# Altium PCB Steering_Wheel_ECU.PcbDoc
Units mm, origin at the board's own origin, x right, y up, seen from the top; angles counter-clockwise.
Board outline 46 x 34.8 mm, 2 copper layers (Top Layer, Bottom Layer); 85 components, 50 nets, 247 pads, 33 vias.
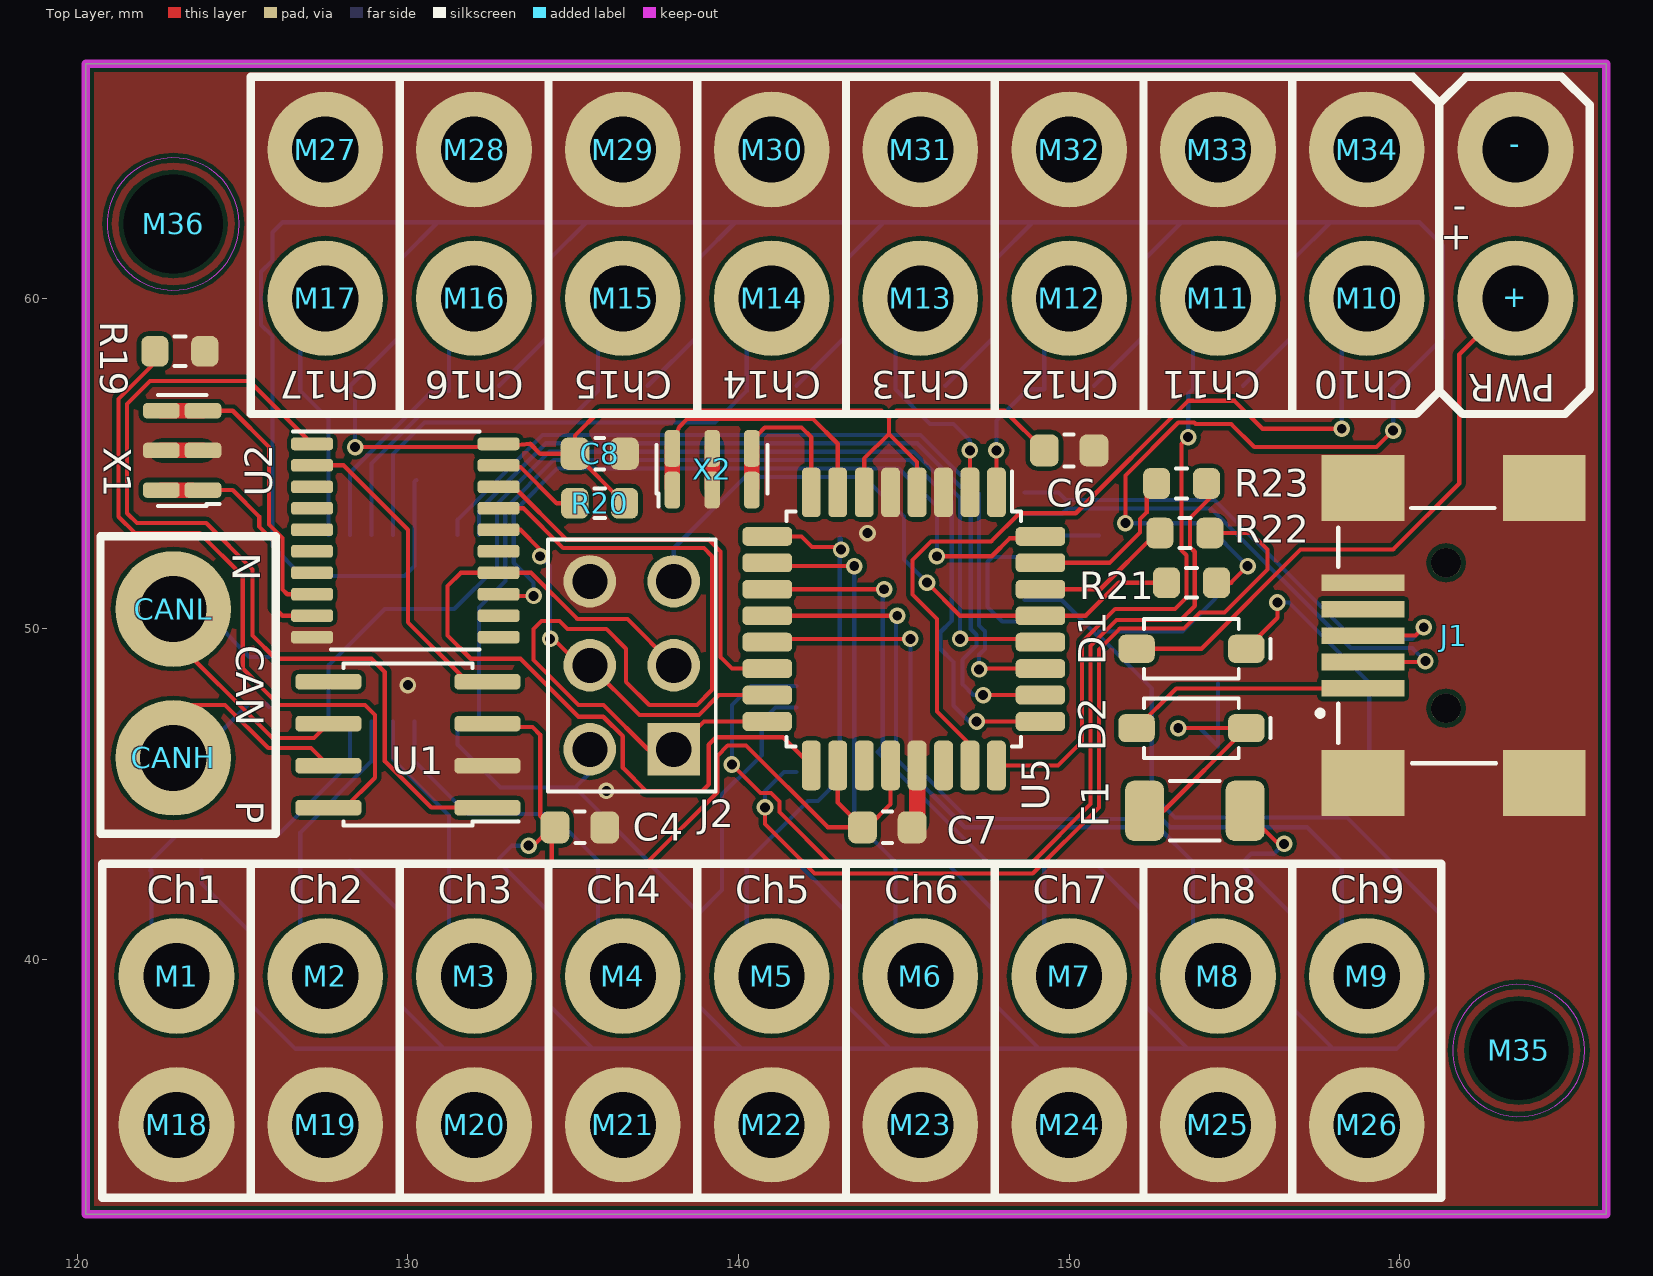
[diagram p0: Top Layer view]
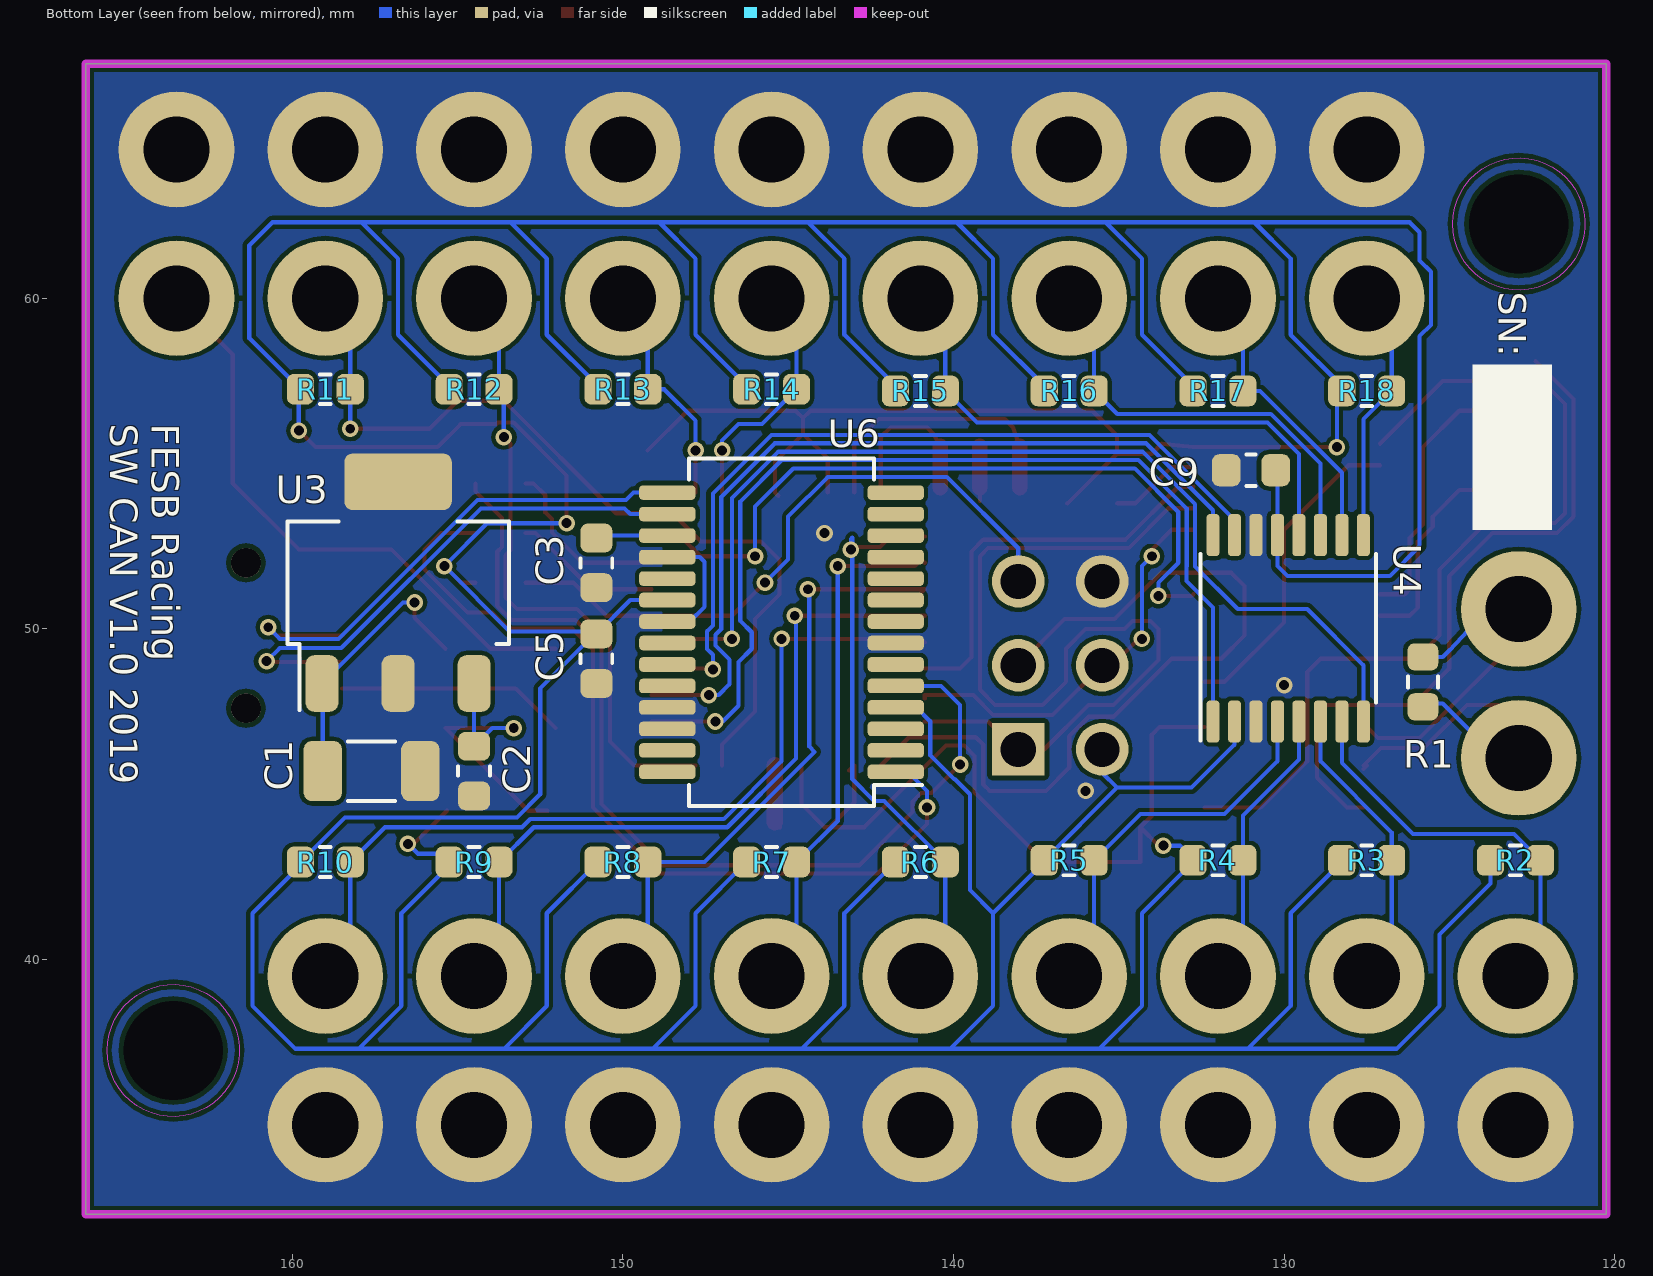
[diagram p1: Bottom Layer view, seen from below]
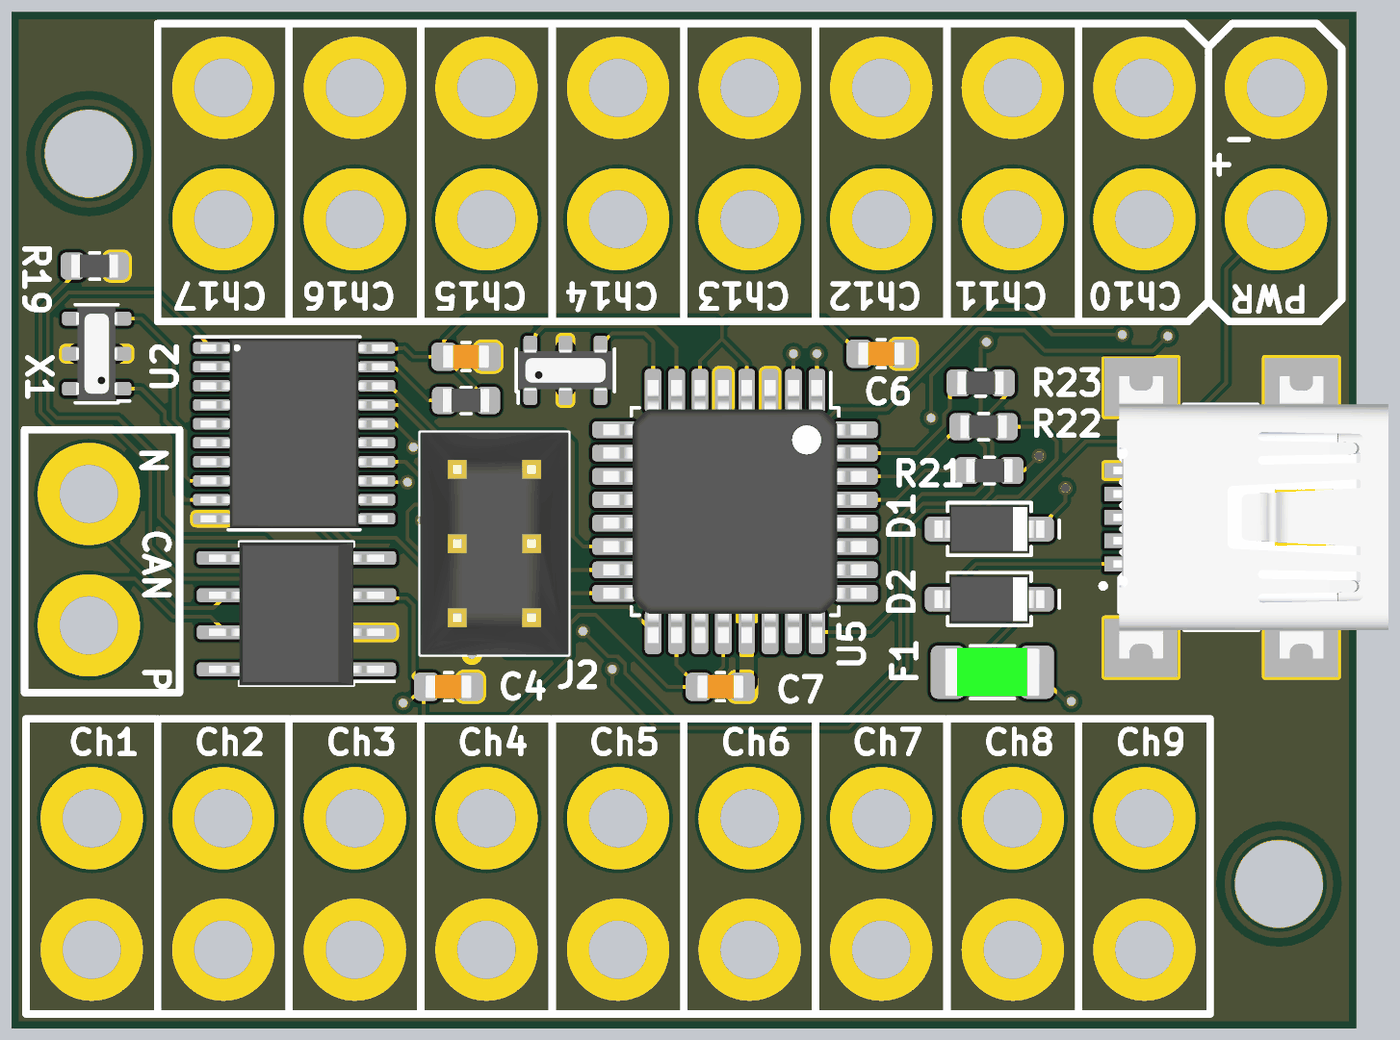
[diagram p2: 3D render of the assembled board from above, using the file's embedded part models]
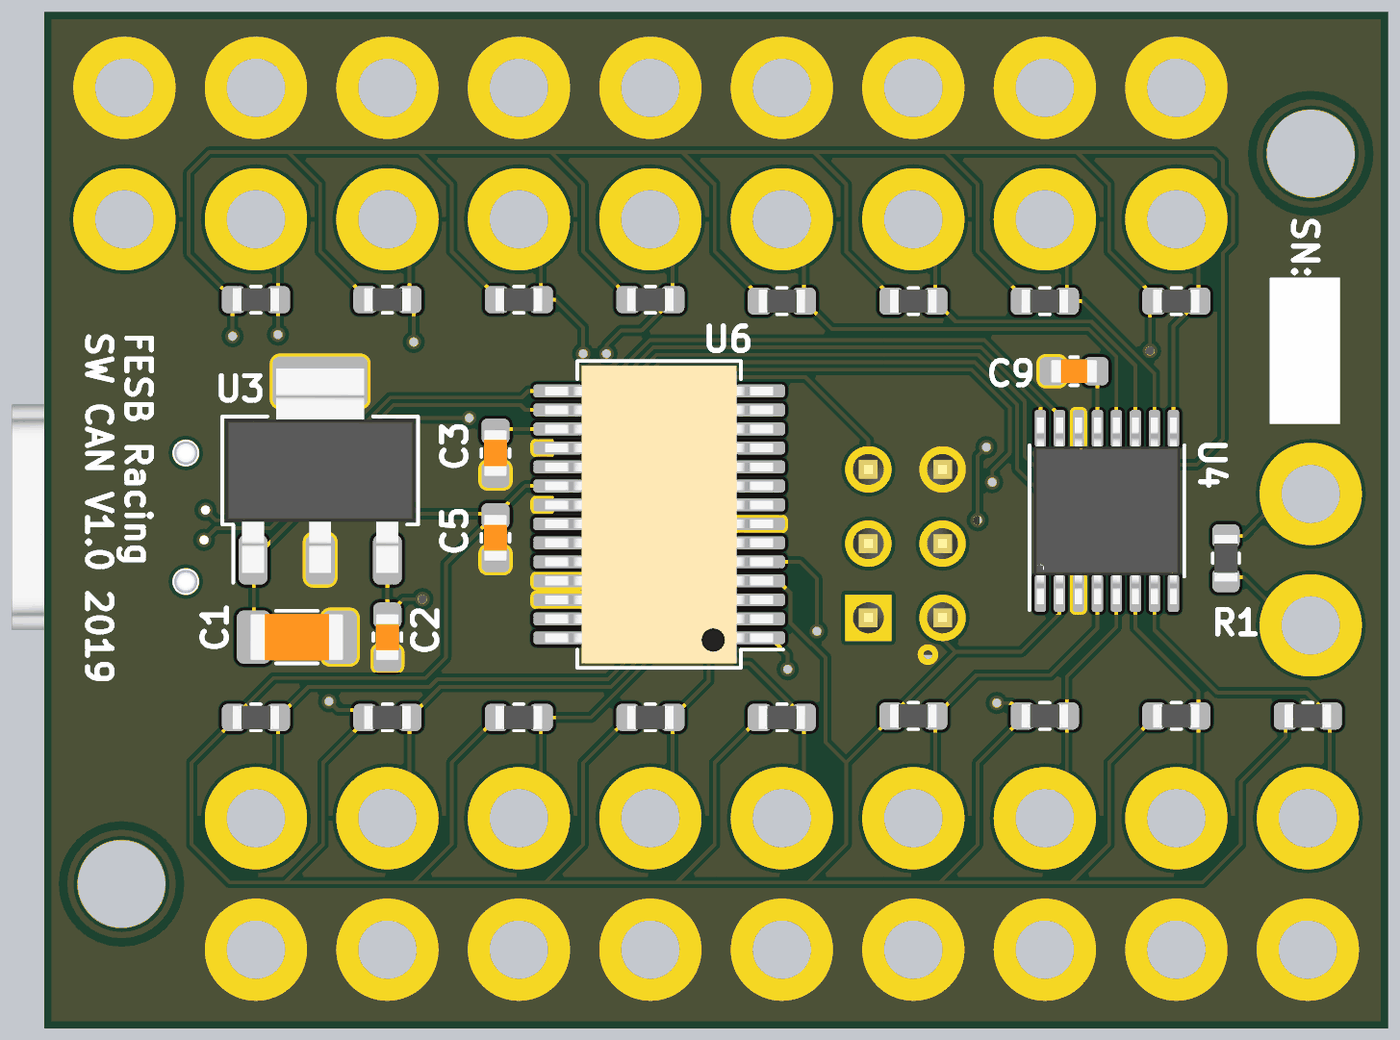
[diagram p3: 3D render of the assembled board from below, using the file's embedded part models]

## Layer stack, top to bottom
Top Solder: solder mask 0.0102, Solder Resist, Dk 3.5
Top Layer: signal copper 0.0356
Dielectric 1: dielectric 0.32, FR-4, Dk 4.8
Bottom Layer: signal copper 0.0356
Bottom Solder: solder mask 0.0102, Solder Resist, Dk 3.5

## Board outline
120.25,32.3 120.25,67.1 166.25,67.1 166.25,32.3

## Design rules (kind name [scope] priority, off if disabled: settings)
Clearance [All] p1: gap=0.127 ignorepadtopadclearanceinfootprint=FALSE except(0: Arc-Hole Track-Hole SMDPad-Hole THPad-Hole Via-Hole Fill-Hole Poly-Hole Region-Hole Text-Hole)
ComponentClearance [All] p1: gap=0.1 collisioncheckmode=3 verticalgap=0.254 showdistances=FALSE
DiffPairsRouting [All] p1: maxlimit=0.254 minlimit=0.127 mostfreqgap=0.178 toplayer_minwidth=0.127 toplayer_maxwidth=0.254 toplayer_prefwidth=0.127 bottomlayer_minwidth=0.127 bottomlayer_maxwidth=0.254 bottomlayer_prefwidth=0.127 maxuncoupledlength=12.7
HoleSize [All] p1: absolutevalues=TRUE maxlimit=5 minlimit=0.025 maxpercent=80.000 minpercent=20.000
MinimumSolderMaskSliver [All] p1: minsoldermaskwidth=0
PlaneConnect [All] p1: planeconnectstyle=Direct reliefexpansion=0.2 reliefentries=4 reliefconductorwidth=0.254 reliefairgap=0.5
PolygonConnect [All] p1: connectstyle=Direct reliefconductorwidth=0.254 reliefentries=4 polygonreliefangle="90 Angle" airgapwidth=0.254
RoutingVias [All] p1: holewidth=0.3 width=0.5 viastyle="Through Hole" minholewidth=0.3 minwidth=0.5 maxholewidth=0.3 maxwidth=0.5
SilkToSilkClearance [All] p1: silktosilkclearance=0.1
SilkToSolderMaskClearance [IsPad] p1: minsilkscreentomaskgap=0.1 clearancetoexposedcopper=TRUE
SolderMaskExpansion [All] p1: expansion=0.102
Width [All] p1: maxlimit=10 minlimit=0.127 preferedwidth=0.127
23 further rules are at their usual default settings.

## Classes and differential pairs
differential pair CAN: +CAN_P -CAN_N

## Components (designator, comment, footprint, x,y, rotation, side; value= is the part's Value field where it differs from the comment)
+ "2mm" HOLE_2MM 163.5,60 r180 top
- "2mm" HOLE_2MM 163.5,64.5 r270 top
C1 "330nF" CAPC320X160X90L50N 157.6,45.7 r180 bottom
C2 "100nF" CAPC160X80X87L35N 154.5,45.7 r270 bottom
C3 "100nF" CAPC160X80X87L35N 150.8,52 r270 bottom
C4 "100nF" CAPC160X80X87L35N 135.2,44 r0 top
C5 "100nF" CAPC160X80X87L35N 150.8,49.1 r270 bottom
C6 "100nF" CAPC160X80X87L35N 150,55.4 r0 top
C7 "100nF" CAPC160X80X87L35N 144.5,44 r0 top
C8 "100nF" CAPC160X80X87L35N 135.8,55.3 r0 top
C9 "100nF" CAPC160X80X87L35N 131,54.8 r0 bottom
CANH "2mm" HOLE_2MM 122.9,46.1 r180 top
CANL "2mm" HOLE_2MM 122.9,50.6 r180 top
D1 "MBR0540" SOD375X160X128L31X60N 153.7,49.4 r180 top
D2 "MBR0540" SOD375X160X128L31X60N 153.7,47 r180 top
F1 "250mA" FUSC325X165X75L42N 153.8,44.5 r180 top
J1 "USB" USB_mini 159.05,48.14 r90 top
J2 "Header_2x3" HDRV6W64P254_3X2_762X508H1100N 138.04,46.36 r90 top
M1 "2mm" HOLE_2MM 123,39.5 r0 top
M2 "2mm" HOLE_2MM 127.5,39.5 r0 top
M3 "2mm" HOLE_2MM 132,39.5 r0 top
M4 "2mm" HOLE_2MM 136.5,39.5 r0 top
M5 "2mm" HOLE_2MM 141,39.5 r0 top
M6 "2mm" HOLE_2MM 145.5,39.5 r0 top
M7 "2mm" HOLE_2MM 150,39.5 r0 top
M8 "2mm" HOLE_2MM 154.5,39.5 r0 top
M9 "2mm" HOLE_2MM 159,39.5 r0 top
M10 "2mm" HOLE_2MM 159,60 r0 top
M11 "2mm" HOLE_2MM 154.5,60 r0 top
M12 "2mm" HOLE_2MM 150,60 r90 top
M13 "2mm" HOLE_2MM 145.5,60 r0 top
M14 "2mm" HOLE_2MM 141,60 r0 top
M15 "2mm" HOLE_2MM 136.5,60 r0 top
M16 "2mm" HOLE_2MM 132,60 r0 top
M17 "2mm" HOLE_2MM 127.5,60 r0 top
M18 "2mm" HOLE_2MM 123,35 r0 top
M19 "2mm" HOLE_2MM 127.5,35 r0 top
M20 "2mm" HOLE_2MM 132,35 r0 top
M21 "2mm" HOLE_2MM 136.5,35 r0 top
M22 "2mm" HOLE_2MM 141,35 r0 top
M23 "2mm" HOLE_2MM 145.5,35 r0 top
M24 "2mm" HOLE_2MM 150,35 r0 top
M25 "2mm" HOLE_2MM 154.5,35 r0 top
M26 "2mm" HOLE_2MM 159,35 r0 top
M27 "2mm" HOLE_2MM 127.5,64.5 r0 top
M28 "2mm" HOLE_2MM 132,64.5 r0 top
M29 "2mm" HOLE_2MM 136.5,64.5 r0 top
M30 "2mm" HOLE_2MM 141,64.5 r0 top
M31 "2mm" HOLE_2MM 145.5,64.5 r0 top
M32 "2mm" HOLE_2MM 150,64.5 r0 top
M33 "2mm" HOLE_2MM 154.5,64.5 r0 top
M34 "2mm" HOLE_2MM 159,64.5 r0 top
M35 "3mm" MTGNPH300Z400 163.6,37.25 r0 top
M36 "3mm" MTGNPH300Z400 122.9,62.25 r0 top
R1 "100R" RESC160X80X50L30N 125.8,48.4 r270 bottom
R2 "10K" RESC160X80X50L30N 123,43 r0 bottom
R3 "10K" RESC160X80X50L30N 127.5,43 r0 bottom
R4 "10K" RESC160X80X50L30N 132,43 r0 bottom
R5 "10K" RESC160X80X50L30N 136.5,43 r0 bottom
R6 "10K" RESC160X80X50L30N 141,42.95 r0 bottom
R7 "10K" RESC160X80X50L30N 145.5,42.95 r0 bottom
R8 "10K" RESC160X80X50L30N 150,42.95 r0 bottom
R9 "10K" RESC160X80X50L30N 154.5,42.95 r0 bottom
R10 "10K" RESC160X80X50L30N 159,42.95 r0 bottom
R11 "10K" RESC160X80X50L30N 159,57.25 r0 bottom
R12 "10K" RESC160X80X50L30N 154.5,57.25 r0 bottom
R13 "10K" RESC160X80X50L30N 150,57.25 r0 bottom
R14 "10K" RESC160X80X50L30N 145.5,57.25 r0 bottom
R15 "10K" RESC160X80X50L30N 141,57.2 r0 bottom
R16 "10K" RESC160X80X50L30N 136.5,57.2 r0 bottom
R17 "10K" RESC160X80X50L30N 132,57.2 r0 bottom
R18 "10K" RESC160X80X50L30N 127.5,57.2 r0 bottom
R19 "20K" RESC160X80X50L30N 123.1,58.4 r180 top
R20 "10K" RESC160X80X50L30N 135.8,53.8 r0 top
R21 "10K" RESC160X80X50L30N 153.7,51.4 r180 top
R22 "1K" RESC160X80X50L30N 153.5,52.9 r180 top
R23 "1K" RESC160X80X50L30N 153.4,54.4 r180 top
U1 "MCP2551" SOIC8P127_490X600X175L83X24N 130,46.5 r90 top
U2 "MCP2515T" SOP20P65_650X640X120L60X24N 129.92,52.675 r270 top
U3 "5V" SOT223-4P230_700X180L80X75N 156.8,51.4 r180 bottom
U4 "ADG708BRUZ" SOP16P65_500X640X120L60X24N 129.875,50.02 r180 bottom
U5 "Atmega328p" QFP32P80_900X900X120L60X37N 145,50 r180 top
U6 "FT232RL" CFP28P65_1020X780X200L75X30N 145.2,49.9 r90 bottom
X1 "16 MHZ" OSCSC6P120_320X130X100L130X40N 123.17,55.4 r90 top
X2 "16 MHZ" OSCSC6P120_320X130X100L130X40N 139.2,54.83 r0 top

## Footprints (in the part's own frame and the unit in brackets; to place one, negate y for a bottom-side part, rotate by r counter-clockwise, add the part's x,y. Pads: shape width x height; smd on the part's side, far side on the other; paste and mask are expansions set on the pad)
CAPC160X80X87L35N [mm] "Capacitor, Chip; 1.60 mm L X 0.80 mm W X 0.87 mm H body"
  rrect51% 0.87x0.97 smd: 1(-0.75,0) 2(0.75,0)
  silkscreen extent -0.14,-0.48 0.14,0.48, body extent -1.39,-0.69 1.39,0.69, height 0.87
CAPC320X160X90L50N [mm] "Capacitor, Chip; 3.20 mm L X 1.60 mm W X 0.90 mm H body"
  rrect43% 1.16x1.82 smd: 1(-1.475,0) 2(1.475,0)
  silkscreen extent -0.71,-0.9 0.71,0.9, body extent -2.27,-1.12 2.27,1.12, height 1
CFP28P65_1020X780X200L75X30N [mm] "Ceramic Flat Pack (CFP), 0.65 mm pitch; 28 pin, 10.20 mm L X 5.30 mm W X 2.00 mm H body"
  rrect50% 0.44x1.7 smd: 1(-4.225,-3.455) 2(-3.575,-3.455) 3(-2.925,-3.455) 4(-2.275,-3.455) 5(-1.625,-3.455) 6(-0.975,-3.455) 7(-0.325,-3.455) 8(0.325,-3.455) 9(0.975,-3.455) 10(1.625,-3.455) 11(2.275,-3.455) 12(2.925,-3.455) 13(3.575,-3.455) 14(4.225,-3.455) 15(4.225,3.455) 16(3.575,3.455) 17(2.925,3.455) 18(2.275,3.455) 19(1.625,3.455) 20(0.975,3.455) 21(0.325,3.455) 22(-0.325,3.455) 23(-0.975,3.455) 24(-1.625,3.455) 25(-2.275,3.455) 26(-2.925,3.455) 27(-3.575,3.455) 28(-4.225,3.455)
  silkscreen extent -5.25,-4.25 5.25,2.8, body extent -5.46,-4.57 5.59,4.57, height 2
FUSC325X165X75L42N [mm] "Fuse, Chip; 3.25 mm L X 1.65 mm W X 0.75 mm H body"
  rrect43% 1.17x1.82 smd: 1(-1.52,0) 2(1.52,0)
  silkscreen extent -0.75,-0.9 0.75,0.9, body extent -2.31,-1.11 2.31,1.11, height 1
HDRV6W64P254_3X2_762X508H1100N [mm] "Header, Vertical, 2.54 mm pitch; 0.64 mm lead width, 6 pins, 2 rows, 3 pins per row, 7.62 mm L X 5.08 mm W X 11.00 mm H body"
  rect 1.59x1.59 hole 1.06 mask+0: 1(0,0)
  round 1.59 hole 1.06 mask+0: 2(0,2.54) 3(2.54,0) 4(2.54,2.54) 5(5.08,0) 6(5.08,2.54)
  silkscreen extent -1.27,-1.27 6.35,3.81, body extent -1.52,-1.52 6.6,4.06, height 11
HOLE_2MM [mm] "Mounting Hole, Non-Plated; 0.50 mm Clearance, 1.00 mm Hole"
  round 3.5 hole 2 mask+0: 1(0,0)
MTGNPH300Z400 [mm] "Mounting Hole, Non-Plated; 1.00 mm Clearance, 3.00 mm Hole"
  round 1 hole 3 mask+0: 1(0,0)
  Keep-Out Layer circle w0.025: c0,0 r2
  Keep-Out Layer circle w0.025: c0,0 r2
OSCSC6P120_320X130X100L130X40N [mm] "Oscillator, Side Concave, 1.20 mm pitch; 6 pin, 3.20 mm L X 1.30 mm W X 1.00 mm H body"
  rrect51% 0.47x1.11 smd: 1(-1.2,-0.63) 1(-1.2,0.63) 2(0,0.63) 2(0,-0.63) 3(1.2,-0.63) 3(1.2,0.63)
  silkscreen extent -1.68,-1.12 1.68,0.73, body extent -1.88,-1.39 1.88,1.39, height 1
QFP32P80_900X900X120L60X37N [mm] "Quad Flat Pack (QFP), 0.80 mm pitch; square, 8 pin X 8 pin, 7.00 mm L X 7.00 mm W X 1.20 mm H body"
  rrect49% 0.57x1.5 smd: 1(-2.8,-4.13) 2(-2,-4.13) 3(-1.2,-4.13) 4(-0.4,-4.13) 5(0.4,-4.13) 6(1.2,-4.13) 7(2,-4.13) 8(2.8,-4.13) 17(2.8,4.13) 18(2,4.13) 19(1.2,4.13) 20(0.4,4.13) 21(-0.4,4.13) 22(-1.2,4.13) 23(-2,4.13) 24(-2.8,4.13)
  rrect49% 1.5x0.57 smd: 9(4.13,-2.8) 10(4.13,-2) 11(4.13,-1.2) 12(4.13,-0.4) 13(4.13,0.4) 14(4.13,1.2) 15(4.13,2) 16(4.13,2.8) 25(-4.13,2.8) 26(-4.13,2) 27(-4.13,1.2) 28(-4.13,0.4) 29(-4.13,-0.4) 30(-4.13,-1.2) 31(-4.13,-2) 32(-4.13,-2.8)
  silkscreen extent -3.55,-4.76 3.55,3.55, body extent -5.08,-5.08 5.08,5.08, height 1.2
RESC160X80X50L30N [mm] "Resistor, Chip; 1.60 mm L X 0.80 mm W X 0.50 mm H body"
  rrect51% 0.82x0.93 smd: 1(-0.755,0) 2(0.755,0)
  silkscreen extent -0.17,-0.45 0.17,0.45, body extent -1.37,-0.67 1.37,0.67, height 1
SOD375X160X128L31X60N [mm] "Diode, Small Outline Diode (SOD); 2.70 mm L X 1.60 mm W X 1.28 mm H body"
  rrect49% 1.1x0.85 smd: A(1.66,0) C(-1.66,0)
  silkscreen extent -2.39,-0.9 1.43,0.9, body extent -2.41,-1.1 2.41,1.1, height 1.28
SOIC8P127_490X600X175L83X24N [mm] "Small Outline IC (SOIC), 1.27 mm pitch; 8 pin, 4.90 mm L X 3.90 mm W X 1.75 mm H body"
  rrect51% 0.47x2 smd: 1(-1.905,-2.405) 2(-0.635,-2.405) 3(0.635,-2.405) 4(1.905,-2.405) 5(1.905,2.405) 6(0.635,2.405) 7(-0.635,2.405) 8(-1.905,2.405)
  silkscreen extent -2.45,-3.34 2.45,1.95, body extent -2.45,-3 2.45,3, height 1.75
SOP16P65_500X640X120L60X24N [mm] "Small Outline Pkg (SOP), 0.65 mm pitch; 16 pin, 5.00 mm L X 4.40 mm W X 1.20 mm H body"
  rrect51% 0.39x1.27 smd: 1(-2.275,-2.82) 2(-1.625,-2.82) 3(-0.975,-2.82) 4(-0.325,-2.82) 5(0.325,-2.82) 6(0.975,-2.82) 7(1.625,-2.82) 8(2.275,-2.82) 9(2.275,2.82) 10(1.625,2.82) 11(0.975,2.82) 12(0.325,2.82) 13(-0.325,2.82) 14(-0.975,2.82) 15(-1.625,2.82) 16(-2.275,2.82)
  silkscreen extent -2.65,-3.39 2.65,2.25, body extent -2.5,-3.2 2.5,3.2, height 1.2
SOP20P65_650X640X120L60X24N [mm] "Small Outline Pkg (SOP), 0.65 mm pitch; 20 pin, 6.50 mm L X 4.40 mm W X 1.20 mm H body"
  rrect51% 0.39x1.27 smd: 1(-2.925,-2.82) 2(-2.275,-2.82) 3(-1.625,-2.82) 4(-0.975,-2.82) 5(-0.325,-2.82) 6(0.325,-2.82) 7(0.975,-2.82) 8(1.625,-2.82) 9(2.275,-2.82) 10(2.925,-2.82) 11(2.925,2.82) 12(2.275,2.82) 13(1.625,2.82) 14(0.975,2.82) 15(0.325,2.82) 16(-0.325,2.82) 17(-0.975,2.82) 18(-1.625,2.82) 19(-2.275,2.82) 20(-2.925,2.82)
  silkscreen extent -3.3,-3.39 3.3,2.25, body extent -3.25,-3.2 3.25,3.2, height 1.2
SOT223-4P230_700X180L80X75N [mm] "Small Outline Transistor (SOT223), 2.30 mm pitch; 4 pin, 6.50 mm L X 3.50 mm W X 1.80 mm H body"
  rrect51% 0.99x1.71 smd: 1(-2.3,-3.05) 2(0,-3.05) 3(2.3,-3.05)
  rrect29% 3.25x1.71 smd: 2(0,3.05)
  silkscreen extent -3.35,-3.85 3.35,1.85, body extent -3.55,-4.1 3.55,4.1, height 1.8
USB_mini [mm]
  rect 0.5x2.5 smd: 1(0.06,0.16) 2(0.86,0.16) 3(1.66,0.16) 4(2.46,0.16) 5(3.26,0.16)
  rect 2x2.5 smd: 6(-2.8,0.16) 6(-2.8,-5.32) 6(6.12,-5.32) 6(6.12,0.16)
  round 0.9 hole 0.9 mask+0: 9(-0.54,-2.35) 9(3.86,-2.35)
  silkscreen extent -2.2,-3.86 5.52,1.5, body extent -3.17,-8.29 6.49,1.11, height 3.9

## Part data
+ - CANH CANL M1 M2 M3 M4 M5 M6 M7 M8 M9 M10 M11 M12 M13 M14 M15 M16 M17 M18 M19 M20 M21 M22 M23 M24 M25 M26 M27 M28 M29 M30 M31 M32 M33 M34: library part Hole_2mm, FR_SN=M-01, Part Number=Hole_2mm
C1: library part C_1206_330nF_50V, Capacitor Case Style=1206, Manufacturer Part Number=C1206C334M5RACAUTO, Supplier Part Number=80-C1206C334M5RAUTO, Voltage Rating=50V, ComponentLinkDescription=Datasheet, ComponentLinkURL=https://hr.mouser.com/datasheet/2/212/KEM_C1023_X7R_AUTO_SMD-1093309.pdf, FR_SN=C_NP-03, Part Number=C_1206_330nF_50V
C2 C3 C4 C5 C6 C7 C8 C9: library part C_0603_100nF_50V, Capacitor Case Style=0603, Manufacturer Part Number=C0603T104J5RACTU, Supplier Part Number=80-C0603T104J5RACTU, Voltage Rating=50V, ComponentLinkDescription=Datasheet, ComponentLinkURL=https://hr.mouser.com/datasheet/2/212/KEM_C1027_X7R_COTS_SMD-1099449.pdf, FR_SN=C_NP-02, Part Number=C_0603_100nF_50V
D1 D2: Diode Case Style=SOD-123, Forward Current="500 mA", Max Reverse Voltage="40 V", Supplier Part Number=512-MBR0540, ComponentLinkDescription=Datasheet, ComponentLinkURL=https://hr.mouser.com/datasheet/2/308/MBR0540-1306677.pdf, FR_SN=D_S-01, Manufacturer Part Number=MBR0540, Part Number=MBR0540
F1: library part F_250mA, Fuse Case Style=1206, Holding Current=500mA, Manufacturer Part Number=0ZCJ0025FF2E, Supplier Part Number=530-0ZCJ0025FF2E, ComponentLinkDescription=Datasheet, ComponentLinkURL=https://hr.mouser.com/datasheet/2/643/0ZCJ_Nov2016-1132002.pdf, FR_SN=F-01, Part Number=F_250mA, Tripping Current=250mA
J1: library part "USB mini", Manufacturer Part Number=UJ2-MBH-1-SMT-TR, Supplier Part Number=490-UJ2-MBH-1-SMT, ComponentLinkDescription=Datasheet, ComponentLinkURL=https://hr.mouser.com/datasheet/2/670/uj2-mbh-smt-1313286.pdf, FR_SN=C-03, Part Number="USB mini"
J2: Manufacturer Part Number=M20-9970345, Supplier Part Number=855-M20-9970345, ComponentLinkDescription=Datasheet, ComponentLinkURL=https://hr.mouser.com/datasheet/2/181/M20-997-1133533.pdf, FR_SN=C-02, Part Number=Header_2x3
M35 M36: library part "Mounting Hole_3mm", FR_SN=M-02, Part Number="Mounting Hole_3mm"
R1: library part R_0603_100R_0W1, Manufacturer Part Number=AC0603FR-13100RL, Power Rating=0W1, Resistor Case Style=0603, Supplier Part Number=603-AC0603FR-13100RL, Temperature Coefficient="100 PPM / C", ComponentLink1Description=Datasheet, ComponentLink1URL=https://hr.mouser.com/datasheet/2/447/PYu-AC_51_RoHS_L_6-1152827.pdf, FR_SN=R-05, Part Number=R_0603_100R_0W1
R2 R3 R4 R5 R6 R7 R8 R9 R10 R11 R12 R13 R14 R15 R16 R17 R18 R20 R21: library part R_0603_10K_0W1, Manufacturer Part Number=RGT1608P-103-B-T5, Power Rating=100mW, Resistor Case Style=0603, Supplier Part Number=754-RGT1608P103BT5, Temperature Coefficient="25 PPM / C", ComponentLink1Description=Datasheet, ComponentLink1URL=https://hr.mouser.com/datasheet/2/392/n_catalog_partition38_en-1388682.pdf, FR_SN=R-02, Part Number=R_0603_10K_0W1
R19: library part R_0603_20K_0W1, Manufacturer Part Number=RT0603BRC1020KL, Power Rating=100mW, Resistor Case Style=0603, Supplier Part Number=603-RT0603BRC1020KL, Temperature Coefficient="15 PPM / C", ComponentLink1Description=Datasheet, ComponentLink1URL=https://hr.mouser.com/datasheet/2/447/PYu-RT_1-to-0.01_RoHS_L_9-1222720.pdf, FR_SN=R-04, Part Number=R_0603_20K_0W1
R22 R23: library part R_0603_1K_0W1, Manufacturer Part Number=CRCW06031K00FKEAC, Power Rating=0.1W, Resistor Case Style=0603, Supplier Part Number=71-CRCW06031K00FKEAC, Temperature Coefficient="100 PPM / C", ComponentLink1Description=Datasheet, ComponentLink1URL=https://hr.mouser.com/ProductDetail/Vishay/CRCW06031K00FKEAC?qs=sGAEpiMZZMtlubZbdhIBIIZe04wfiaJW%2fzoax%252b8jFdk%3d, FR_SN=R-01, Part Number=R_0603_1K_0W1
U1: IC Case Style=SOIC-8, Manufacturer Part Number=MCP2551-I/SN, Supplier Part Number=579-MCP2551-I/SN, Category="Hi Spd CAN Transceiver", ComponentLinkDescription=Datasheet, ComponentLinkURL=https://hr.mouser.com/datasheet/2/268/20001667G-1115479.pdf, FR_SN=IC_Misc-04, Part Number=MCP2551
U2: library part MCP2515, IC Case Style=TSSOP-20, Manufacturer Part Number=MCP2515T-I/ST, Supplier Part Number=579-MCP2515T-I/ST, Category="CAN Controller with SPI Interface", ComponentLinkDescription=Datasheet, ComponentLinkURL=https://hr.mouser.com/datasheet/2/268/20001801H-708845.pdf, FR_SN=IC_Misc'03, Part Number=MCP2515
U3: library part 7805, IC Case Style="SOT223 (with common TAB)", Manufacturer Part Number=UA78M05CDCYR, Supplier Part Number=595-UA78M05CDCYR, Category="Positive Voltage Regulators", ComponentLinkDescription=Datasheet, ComponentLinkURL=http://www.ti.com/lit/ds/symlink/ua78m.pdf, FR_SN=IC_Reg-01, Part Number=7805
U4: library part ADG708, IC Case Style=TSSOP-16, Manufacturer Part Number=ADG708BRUZ-REEL7, Supplier Part Number=584-ADG708BRUZ-R7, Category="Multiplexer Switch 55MHz 3 Ohm CMOS", ComponentLinkDescription=Datasheet, ComponentLinkURL=https://hr.mouser.com/datasheet/2/609/ADG708_709-878563.pdf, FR_SN=IC_Misc-02, Part Number=ADG708
U5: IC Case Style=TQFP-32, Manufacturer Part Number=ATMEGA328PB-AU, Supplier Part Number=556-ATMEGA328PB-AU, Category="Arduino Nano MCU", ComponentLinkDescription=Datasheet, ComponentLinkURL=https://hr.mouser.com/datasheet/2/268/40001906A-1222909.pdf, FR_SN=MCU-01, Part Number=Atmega328p
U6: IC Case Style=SSOP-28, Manufacturer Part Number=FT232RL-REEL, Supplier Part Number=895-FT232RL, Category="USB to UART", ComponentLinkDescription=Datasheet, ComponentLinkURL=https://hr.mouser.com/datasheet/2/163/DS_FT232R-11534.pdf, FR_SN=IC_Misc-01, Part Number=FT232RL
X1 X2: library part X_16MHZ, Crystal Case Style=CERALOCK, Frequency="15 MHZ", Frequency Tolerance="0.5 %", Manufacturer Part Number=CSTCE16M0V53-R0, Supplier Part Number=81-CSTCE16M0V53-R0, ComponentLinkDescription=Datasheet, ComponentLinkURL=https://hr.mouser.com/datasheet/2/281/p16e-522700.pdf, FR_SN=X-01, Part Number=X_16MHZ

## Via types
v1: diameter 0.5, hole 0.3, Top Layer to Bottom Layer, 33 vias

## Nets (pads, with @x,y where several pads share a name; then routed paths per layer and width w, separated by ;. In a path a pad name is that pad's centre, name@x,y a point inside that pad or via, vN(x,y) a via of type N, cw(c..) or ccw(c..) an arc to the next point about the centre after c; other vN are vias at no path point)
CAN_N: CANL.1 R1.1 U1.6 | length 10.2
  Top Layer w0.127: CANL.1@123.2,50.5 122.7,50 122.7,49.9 125.9,46.7 127.16,46.7 U1.6
  Bottom Layer w0.127: CANL.1@123.555,50.9 123.586,50.867 123.829,50.607 124.101,50.317 124.244,50.163 125,49.355 125.2,49.155 R1.1
CAN_P: CANH.1 R1.2 U1.7 | length 10.1
  Top Layer w0.127: CANH.1@122.7,46.1 122.7,47.7 124.469,47.7 125.774,46.395 127.065,46.395 U1.7 ; U1.7@127.495,45.865 U1.7@127.595,45.765
  Bottom Layer w0.127: CANH.1@123.755,46.3 125.2,47.745 125.7,47.745 R1.2
GND: -.1 C1.2 C2.2 C3.2 C4.2 C5.2 C6.2 C7.2 C8.2 C9.2 J1.5 J1.6 J2.6 M18.1 M19.1 M20.1 M21.1 M22.1 M23.1 M24.1 M25.1 M26.1 M27.1 M28.1 M29.1 M30.1 M31.1 M32.1 M33.1 M34.1 R19.1 U1.2 U2.10 U3.2 U4.3 U4.14 U5.3 U5.5 U5.21 U6.7 U6.18 U6.21 U6.25 U6.26 X1.2 X2.2 | length 8.6
  Top Layer w0.127: X2.2@139.2,53.88 X2.2@139.2,54.2 ; C7.2 C7.2@145.4,44.15
  Top Layer w0.47: X1.2@122.54,55.4 X1.2@123.8,55.4 ; X2.2@139.2,54.27 139.2,55.46 X2.2@139.2,55.53
  Top Layer w0.5: C7.2@145.4,44.15 U5.21
  Bottom Layer w0.127: U6.21 147.975,50.225 147.531,50.669 147.531,52.031 147.675,52.175 U6.18
  other v1: 136,45.1 130,48.3 143.9,52.9
INT: U2.13 U5.32 | length 22.6
  Top Layer w0.127: U2.13 132.79,51 v1(133.8,51) ; v1(146,52.2) 147.659,52.2 148.205,52.746 149.076,52.746 U5.32
  Bottom Layer w0.127: v1(133.8,51) 133.8,51.4 133.2,52 133.2,53.541 134.513,54.854 144.846,54.854 146,53.7 v1(146,52.2)
M1: M1.1 R2.1 U4.7 | length 11.5
  Bottom Layer w0.127: R2.1@122.2,42.7 122.245,42.7 122.245,40.755 M1.1@123,40 ; R2.1 123.045,43.8 126.1,43.8 128.25,45.95 U4.7
M2: M2.1 R3.1 U4.6 | length 8.4
  Bottom Layer w0.127: M2.1@127.5,40 126.745,40.755 R3.1 126.745,43.845 128.9,46 U4.6
M3: M3.1 R4.1 U4.5 | length 8.2
  Bottom Layer w0.127: U4.5 129.55,46.05 131.245,44.355 R4.1 131.245,40.755 M3.1@132,40
M4: M4.1 R5.1 U4.4 | length 11.3
  Bottom Layer w0.127: U4.4 130.2,46 131.8,44.4 134.345,44.4 R5.1 135.745,40.755 M4.1@136.5,40
M5: M5.1 R6.1 U5.9 | length 17.2
  Top Layer w0.127: U5.9 141.9,52.8 142.224,52.476 143.024,52.476 v1(143.1,52.4)
  Bottom Layer w0.127: M5.1@141,40 140.245,40.755 R6.1 142.095,44.8 142.4,44.8 143.06,45.46 143.06,52.76 143.1,52.719 v1(143.1,52.4)
M6: M6.1 R7.1 U5.10 | length 15.5
  Top Layer w0.127: U5.10 140.97,52.1 141.17,51.9 v1(143.5,51.9)
  Bottom Layer w0.127: v1(143.5,51.9) 143.5,44.195 R7.1 144.745,40.755 M6.1@145.5,40
M7: M7.1 R8.1 U5.11 | length 18.4
  Top Layer w0.127: U5.11@140.97,51.1 U5.11 v1(144.4,51.2)
  Bottom Layer w0.127: v1(144.4,51.2) 144.36,51.159 144.36,46.441 144.2,46.282 147.532,42.95 R8.1 149.245,40.755 M7.1@150,40
M8: M8.1 R9.1 U5.12 | length 21.8
  Top Layer w0.127: U5.12 v1(144.8,50.4)
  Bottom Layer w0.127: v1(144.8,50.4) 144.759,50.36 144.759,46.081 146.841,44 152.695,44 R9.1 153.745,40.755 M8.1@154.5,40
M9: M9.1 R10.1 U5.13 | length 26.7
  Top Layer w0.127: U5.13 140.97,49.7 v1(145.2,49.7)
  Bottom Layer w0.127: v1(145.2,49.7) 145.2,46 146.946,44.254 152.8,44.254 153.054,44 157.195,44 R10.1 158.245,40.755 159,40 M9.1 M9.1@159,38.9
M10: M10.1 R11.1 U5.23 | length 26.5
  Top Layer w0.127: U5.23 147,46.5 146,47.5 146,50.3 145.26,51.04 145.26,52.082 145.818,52.64 147.64,52.64 148.5,53.5 150.2,53.5 153.6,56.9 155,56.9 155.845,56.055 v1(158.245,56.055)
  Bottom Layer w0.127: v1(158.245,56.055) R11.1 158.245,59.245 M10.1
M11: M11.1 R12.1 U5.24 | length 19.2
  Top Layer w0.127: U5.24 149.662,45.87 150.392,46.6 150.392,49.601 151.391,50.6 153.2,50.6 153.546,50.946 153.546,52.228 153.4,52.374 153.4,55.6 v1(153.6,55.8)
  Bottom Layer w0.127: v1(153.6,55.8) 153.6,57.105 R12.1 153.745,59.245 M11.1
M12: M12.1 R13.1 U5.1 | length 7.1
  Top Layer w0.127: U5.1 v1(147.8,55.4)
  Bottom Layer w0.127: v1(147.8,55.4) 147.8,56.3 148.75,57.25 R13.1 149.245,59.245 M12.1
M13: M13.1 R14.1 U5.2 | length 7.5
  Top Layer w0.127: U5.2 v1(147,55.4)
  Bottom Layer w0.127: M13.1 144.745,59.245 R14.1 145.795,56.2 146.5,56.2 147,55.7 v1(147,55.4)
M14: M14.1 R15.1 U4.12 | length 17
  Bottom Layer w0.127: U4.12 129.55,55.291 130.505,56.246 139.291,56.246 R15.1 140.245,59.245 M14.1
M15: M15.1 R16.1 U4.11 | length 13
  Bottom Layer w0.127: U4.11 128.9,55 130.4,56.5 135.045,56.5 R16.1 135.745,59.245 M15.1
M16: M16.1 R17.1 U4.10 | length 9
  Bottom Layer w0.127: U4.10 128.25,54.725 130.725,57.2 R17.1 131.245,59.245 M16.1
M17: M17.1 R18.1 U4.9 | length 7.8
  Bottom Layer w0.127: M17.1 126.745,59.245 R18.1 127.6,56.345 U4.9
MISO: J2.1 U2.17 U5.16 | length 27.9
  Top Layer w0.127: U2.17 133.491,53.65 134.695,52.446 138.954,52.446 139.2,52.2 139.2,48.159 138.741,47.7 137.3,47.7 136.6,48.4 136.6,49.4 136,50 134.823,50 134.582,50.24 134.04,50.24 133.8,50 133.8,49.059 135.159,47.7 135.913,47.7 137.253,46.36 J2.1 138.119,46.36 138.959,47.2 U5.16
MOSI: J2.4 U2.16 U5.15 | length 12.2
  Top Layer w0.127: U2.16 133.4,53 134,52.4 v1(134,52.2) ; v1(134.3,49.7) 134.4,49.7 135.2,48.9 J2.4 137,47.4 138.8,47.4 139.4,48 U5.15 U5.15@140.87,47.9
  Bottom Layer w0.127: v1(134,52.2) 134.3,51.9 v1(134.3,49.7)
Net+_1: +.1 D1.A | length 18.1
  Top Layer w0.127: D1.A 154,49.4 157,52.4 159.8,52.4 161.8,54.4 161.8,58.3 +.1
NetC1_1: C1.1 D1.C U3.1 | length 8.3
  Top Layer w0.127: D1.C 156.3,50.34 v1(156.3,50.8)
  Bottom Layer w0.127: v1(156.3,50.8) 156.65,50.8 U3.1 159.075,48.325 C1.1
NetC2_1: C2.1 D2.C F1.2 U3.3 | length 9.5
  Top Layer w0.127: F1.2 152.86,44.5 D2.C v1(153.3,47)
  Bottom Layer w0.127: v1(153.3,47) 153.95,47 C2.1 U3.3
NetC3_1: C3.1 U6.17 | length 2.2
  Bottom Layer w0.127: U6.17 C3.1@150.9,52.825
NetD2_A: D2.A J1.1 | length 6.9
  Top Layer w0.127: D2.A 153.24,48.2 J1.1@158.49,48.2
NetJ1_2: J1.2 U6.16 | length 16.4
  Top Layer w0.127: J1.2@158.49,49 160.75,49 v1(160.775,49.025)
  Bottom Layer w0.127: U6.16 149.775,53.475 149.946,53.646 154.295,53.646 158.516,49.425 160.375,49.425 v1(160.775,49.025)
NetJ1_3: J1.3 U6.15 | length 16.4
  Top Layer w0.127: J1.3@158.49,49.8 160.475,49.8 v1(160.725,50.05)
  Bottom Layer w0.127: U6.15 149.675,54.125 149.9,53.9 154.4,53.9 158.6,49.7 160.375,49.7 v1(160.725,50.05)
NetR19_2: R19.2 U1.8 | length 20.7
  Top Layer w0.127: R19.2@122.39,58.1 121.246,56.956 121.246,53.395 121.741,52.9 123.7,52.9 125.006,51.594 125.006,48.794 126.1,47.7 128.7,47.7 129,47.4 129,45.5 128.095,44.595 U1.8
NetR20_1: R20.1 U2.19 | length 2.8
  Top Layer w0.127: U2.19 132.79,54.9 133.4,54.9 134.5,53.8 R20.1
NetR22_1: R22.1 U6.1 | length 27
  Top Layer w0.127: v1(140.8,44.6) 140.8,44.1 142.3,42.6 148.9,42.6 150.9,44.6 150.9,49.382 151.533,50.016 153.475,50.016 153.959,50.5 154.7,50.5 156,51.8 156,52.4 155.5,52.9 R22.1@154.455,52.9
  Bottom Layer w0.127: v1(140.8,44.6) 140.8,45.1 141.375,45.675 U6.1
NetR22_2: R22.2 U5.30 | length 4.5
  Top Layer w0.127: U5.30 150.941,51.2 152.641,52.9 R22.2 R22.2@152.945,52.9
NetR23_1: R23.1 U6.5 | length 29.6
  Top Layer w0.127: v1(139.8,45.9) 140.66,45.04 140.982,45.04 141.24,44.782 141.24,44.46 142.846,42.854 148.795,42.854 150.646,44.705 150.646,49.488 151.428,50.27 153.37,50.27 153.8,50.7 153.8,52.334 153.654,52.479 153.654,53.354 154.455,54.155 R23.1@154.455,54.4
  Bottom Layer w0.127: v1(139.8,45.9) 139.8,47.7 140.375,48.275 U6.5
NetR23_2: R23.2 U5.31 | length 5.3
  Top Layer w0.127: U5.31 151.223,52 152.144,52.922 152.144,53.321 152.344,53.521 152.344,54.044 152.7,54.4 R23.2@152.945,54.4
NetU1_1: U1.1 U2.1 | length 27.3
  Top Layer w0.127: U2.1 125.2,57.5 122.2,57.5 121.5,56.8 121.5,53.5 121.8,53.2 123.9,53.2 125.3,51.8 125.3,49.8 126,49.1 128.9,49.1 129.3,48.7 129.3,46 130.705,44.595 U1.1
NetU1_4: U1.4 U2.2 | length 9.7
  Top Layer w0.127: U2.2 128.05,54.95 130,53 130,50.2 131.795,48.405 U1.4
NetU2_8: U2.8 X1.3 | length 9.1
  Top Layer w0.127: X1.3@123.8,56.6 124.7,56.6 125.8,55.5 125.8,53.162 126.208,52.754 126.208,51.192 126.35,51.05 U2.8
  Top Layer w0.47: X1.3@122.54,56.6 X1.3@123.8,56.6
NetU2_9: U2.9 X1.1 | length 6.9
  Top Layer w0.127: X1.1@124.1,54.2 124.7,54.2 125.5,53.4 125.5,53.103 125.954,52.649 125.954,50.646 126.2,50.4 U2.9
  Top Layer w0.47: X1.1@122.54,54.2 X1.1@123.47,54.2
NetU4_1: U4.1 U5.25 | length 30.7
  Top Layer w0.127: v1(147.2,47.2) U5.25
  Bottom Layer w0.127: U4.1 132.15,50.65 132.954,51.454 132.954,51.887 132.946,51.895 132.946,53.646 134.408,55.108 145.192,55.108 146.446,53.854 146.446,50.246 146.1,49.9 146.1,49.4 146.5,49 146.5,47.677 146.977,47.2 v1(147.2,47.2)
NetU4_8: U4.8 U5.28 | length 31.9
  Top Layer w0.127: v1(146.7,49.7) 149.03,49.7 U5.28
  Bottom Layer w0.127: U4.8 127.6,48.9 129.3,50.6 131.4,50.6 132.692,51.892 132.692,53.774 134.28,55.362 145.297,55.362 146.7,53.959 v1(146.7,49.7)
NetU4_15: U4.15 U5.27 | length 25.4
  Top Layer w0.127: v1(147.277,48.777) 147.3,48.8 U5.27
  Bottom Layer w0.127: U4.15 131.5,53.3 134.07,55.87 145.508,55.87 147.277,54.101 147.277,50.105 147.454,49.928 147.454,49.395 147.277,49.218 v1(147.277,48.777)
NetU4_16: U4.16 U5.26 | length 25.5
  Top Layer w0.127: v1(147.4,48) U5.26
  Bottom Layer w0.127: U4.16 132.15,53.591 134.175,55.616 145.402,55.616 147.023,53.995 147.023,50 147.2,49.823 147.2,49.5 146.77,49.07 146.77,48.33 147.1,48 v1(147.4,48)
NetU5_7: U5.7 X2.1 | length 8.5
  Top Layer w0.127: X2.1@138,55.53 138.2,56.1 138.446,56.346 142.254,56.346 143,55.6 U5.7
  Top Layer w0.47: X2.1@138,54.27 138,55.46 X2.1@138,55.53
NetU5_8: U5.8 X2.3 | length 5.2
  Top Layer w0.127: X2.3@140.4,55.53 140.6,55.9 140.792,56.092 141.908,56.092 142.2,55.8 U5.8
  Top Layer w0.47: X2.3@140.4,54.27 X2.3@140.4,55.53
RST: J2.5 R21.2 U5.29 | length 19.7
  Top Layer w0.127: v1(145.7,51.4) 146.7,50.4 U5.29 150.5,50.4 151.5,51.4 R21.2
  Bottom Layer w0.127: J2.5 138.04,52.44 140.2,54.6 143.8,54.6 145,53.4 145,52.1 v1(145.7,51.4)
SCK: J2.3 U2.14 U5.17 | length 24.9
  Top Layer w0.127: J2.3 136.64,50.3 135.123,50.3 133.723,51.7 U2.14 131.6,51.7 131.2,51.3 131.2,49.8 131.9,49.1 133.4,49.1 135.154,47.346 135.908,47.346 136.5,46.754 136.5,45.8 137.2,45.1 138.9,45.1 139.1,45.3 139.1,46.5 139.325,46.725 141.346,46.725 U5.17
SS: U2.18 U5.14 | length 12.3
  Top Layer w0.127: U2.18 133.2,54.3 134.8,52.7 139.1,52.7 139.454,52.346 139.454,49.146 139.8,48.8 U5.14
VCC: C4.1 C5.1 C6.1 C7.1 C8.1 C9.1 F1.1 J2.2 R2.2 R3.2 R4.2 R5.2 R6.2 R7.2 R8.2 R9.2 R10.2 R11.2 R12.2 R13.2 R14.2 R15.2 R16.2 R17.2 R18.2 R20.2 R21.1 U1.3 U2.20 U4.2 U4.13 U5.4 U5.6 U5.18 U5.20 U6.4 U6.20 | length 310.7
  Top Layer w0.127: v1(128.4,55.5) 132.74,55.5 132.75,55.501 133.7,55.6 134,55.3 C8.1 ; U1.3@132.405,47.035 133.765,47.035 134,46.8 134,44.35 C4.1@134.35,44 ; v1(133.647,43.445) 133.795,43.445 C4.1@134.35,44 ; R20.2 136.55,53.8 C8.1 ; U5.18@143.15,45.72 U5.18 143,44.75 C7.1 ; U5.6 143.8,55.15 144.55,55.9 ; U5.20 144.6,44.7 143.9,44 C7.1 ; U5.4@145.3,54.03 U5.4 145.4,55.05 144.55,55.9 ; C6.1 148.05,56.6 144.775,56.6 144.55,56.375 ; v1(151.7,53.2) 151.7,54.64 153.3,56.24 153.782,56.24 153.823,56.2 154.9,56.2 155.6,55.5 159.3,55.5 v1(159.8,56) ; R21.1 154.9,51.4 v1(155.4,51.9) ; F1.1 156.45,43.37 156.5,43.42 v1(156.5,43.5) ; C4.1@134.35,44 134.35,42.95 137.25,42.95 139.36,45.06 139.36,46.16 139.671,46.471 140.229,46.471 142.7,44 C7.1 ; C8.1 135.05,55.85 135.8,56.6 144.325,56.6 144.55,56.375 ; 144.55,55.9 144.55,56.375
  Bottom Layer w0.127: R2.2 123.755,42.3 125.3,40.755 125.3,38.6 126.6,37.3 131.1,37.3 ; R3.2 128.255,42.945 129.8,41.4 129.8,38.6 131.1,37.3 ; v1(128.4,55.5) 128.4,57.055 R18.2 128.255,57.355 129.8,58.9 129.8,61.2 130.9,62.3 ; C9.1@130.25,54.5 130.2,54.45 U4.13 130.2,51.9 129.9,51.6 126.8,51.6 125.9,52.5 125.9,58.856 125.559,59.196 125.559,60.804 125.9,61.144 125.9,62 126.2,62.3 130.9,62.3 ; U4.2 131.5,46.5 132.8,45.2 135.055,45.2 ; R4.2@132.755,42.945 134.3,41.4 134.3,38.6 135.6,37.3 ; R4.2 132.755,43.055 133.145,43.445 v1(133.647,43.445) ; R17.2@132.755,57.355 134.3,58.9 134.3,61.2 135.4,62.3 ; J2.2 135.5,45.645 135.055,45.2 ; R5.2@137.255,42.945 138.8,41.4 ; R5.2 135.055,45.2 ; R16.2@137.255,57.355 138.8,58.9 138.8,61.2 139.9,62.3 ; U6.4 141.12,47.625 140.704,47.209 140.704,46.182 139.982,45.46 139.959,45.46 139.5,45 139.5,42.1 138.8,41.4 ; R6.2@141.755,42.945 143.3,41.4 143.3,38.6 144.6,37.3 ; R15.2@141.755,57.355 143.3,58.9 143.3,61.2 144.4,62.3 ; R7.2@146.255,42.945 147.8,41.4 147.8,38.6 149.1,37.3 ; R14.2@146.255,57.355 147.8,58.9 147.8,61.2 148.9,62.3 ; U6.20 149.775,50.875 C5.1 C5.1@150.9,49.75 ; R8.2@150.755,42.945 152.3,41.4 152.3,38.6 153.6,37.3 ; R13.2@150.755,57.355 152.3,58.9 152.3,61.2 153.4,62.3 ; v1(151.7,53.2) 154.1,53.2 ; 154.1,53.2 v1(155.4,51.9) 153.425,49.925 150.9,49.925 150.9,49.8 152.5,48.2 152.5,45 153.2,44.3 158.405,44.3 R10.2 ; R9.2@155.203,42.897 156.7,41.4 156.7,38.6 158,37.3 ; R9.2 155.505,43.2 156.2,43.2 v1(156.5,43.5) ; R12.2@155.255,57.355 156.8,58.9 156.8,61.2 157.9,62.3 ; R10.2@159.702,42.898 161.2,41.4 161.2,38.6 159.9,37.3 158,37.3 ; v1(159.8,56) 159.8,57.205 R11.2 161.3,58.795 161.3,61.6 160.6,62.3 157.9,62.3 ; 130.9,62.3 135.4,62.3 ; 131.1,37.3 135.6,37.3 ; 135.4,62.3 139.9,62.3 ; 135.6,37.3 140.1,37.3 ; 138.8,41.4 138.8,38.6 140.1,37.3 ; 139.9,62.3 144.4,62.3 ; 140.1,37.3 144.6,37.3 ; 144.4,62.3 148.9,62.3 ; 144.6,37.3 149.1,37.3 ; 148.9,62.3 153.4,62.3 ; 149.1,37.3 153.6,37.3 ; 153.4,62.3 157.9,62.3 ; 153.6,37.3 158,37.3
pads on no net: J1.4 J1.9 M35.1 M36.1 U1.5 U2.3 U2.4 U2.5 U2.6 U2.7 U2.11 U2.12 U2.15 U5.19 U5.22 U6.2 U6.3 U6.6 U6.8 U6.9 U6.10 U6.11 U6.12 U6.13 U6.14 U6.19 U6.22 U6.23 U6.24 U6.27 U6.28

## Polygon pours and split planes (outlines as drawn)
GND on Top Layer "Top Layer-No Net" (solid, pour order 8): 120.25,32.3 120.25,67.1 166.25,67.1 166.25,32.3
GND on Bottom Layer "GND_L02_P010" (solid, pour order 10): 120.25,32.3 120.25,67.1 166.25,67.1 166.25,32.3

## Keep-outs
Keep-Out Layer:
  the board outline again, w0.254

## Silkscreen, mask and mechanical layers (free items; w line width, h text height)
Top Overlay:
  lines w0.254: 125.25,33.25 125.25,32.8 ; 125.25,42.9 125.25,32.8 ; 129.75,42.9 129.75,32.8 ; 129.75,56.6 129.75,66.7 ; 134.25,56.6 134.25,66.7 ; 134.3,42.9 120.75,42.9 120.75,32.8 125.25,32.8 ; 138.75,33.25 138.75,32.8 ; 138.75,56.6 138.75,66.7 ; 143.25,33.25 143.25,32.8 ; 143.25,42.9 143.25,32.8 ; 143.25,56.6 143.25,66.7 ; 147.75,33.25 147.75,32.8 ; 147.75,42.9 147.75,32.8 ; 147.75,56.6 147.75,66.7 ; 152.25,33.25 152.25,32.8 ; 152.25,42.9 152.25,32.8 ; 156.75,33.25 156.75,32.8 ; 156.75,42.9 156.75,32.8 ; 157.1,56.5 152.25,56.5 ; 125.25,32.8 129.75,32.8 ; 129.75,32.8 134.25,32.8 ; 129.75,66.7 134.25,66.7 ; 129.75,66.7 125.25,66.7 125.25,56.5 152.25,56.5 ; 134.25,32.8 134.25,42.9 138.75,42.9 ; 134.25,32.8 138.75,32.8 ; 134.25,66.7 138.75,66.7 ; 138.75,32.8 138.75,42.9 ; 138.75,32.8 143.25,32.8 ; 138.75,42.9 161.25,42.9 161.25,32.8 156.75,32.8 ; 138.75,66.7 143.25,66.7 ; 143.25,32.8 147.75,32.8 ; 143.25,66.7 147.75,66.7 ; 147.75,32.8 152.25,32.8 ; 147.75,66.7 152.25,66.7 ; 152.25,32.8 156.75,32.8 ; 152.25,56.5 152.25,66.7 ; 152.25,66.7 156.75,66.7 ; 156.75,66.7 156.75,56.5 160.5,56.5 161.2,57.2 ; 156.75,66.7 160.4,66.7 161.2,65.9 ; 161.2,57.2 161.9,56.5 165,56.5 165.75,57.25 165.75,65.85 164.9,66.7 162,66.7 161.2,65.9 ; 161.2,57.2 161.2,65.6 161.2,65.9 ; 120.7,43.8 120.7,44.2 120.7,52.8 120.9,52.8 123,52.8 126,52.8 126,43.8 120.7,43.8
  text "-" at 161.6,62.4 h0.84
  text "+" at 162.2,62.2 h0.84 r180
  text "Ch17" at 129.1,57.8 h0.84 r180
  text "Ch16" at 133.5,57.8 h0.84 r180
  text "Ch15" at 138,57.8 h0.84 r180
  text "Ch14" at 142.5,57.8 h0.84 r180
  text "Ch13" at 147,57.8 h0.84 r180
  text "Ch12" at 151.5,57.8 h0.84 r180
  text "Ch11" at 155.8,57.8 h0.84 r180
  text "Ch10" at 160.4,57.8 h0.84 r180
  text "PWR" at 164.7,57.7 h0.84 r180
  text "N" at 124.7,52.3 h0.84 r270
  text "CAN" at 124.8,49.5 h0.84 r270
  text "P" at 124.8,44.8 h0.84 r270
  text "Ch1" at 122.1,41.7 h0.84
  text "Ch2" at 126.4,41.7 h0.84
  text "Ch3" at 130.9,41.7 h0.84
  text "Ch4" at 135.4,41.7 h0.84
  text "Ch5" at 139.9,41.7 h0.84
  text "Ch6" at 144.4,41.7 h0.84
  text "Ch7" at 148.9,41.7 h0.84
  text "Ch8" at 153.4,41.7 h0.84
  text "Ch9" at 157.9,41.7 h0.84
Bottom Overlay:
  rectangle: 121.9,53 124.3,58
  text "SN:" at 123.5,60.2 h0.84 r90
  text "FESB Racing / SW CAN V1.0 2019" at 165.5,56.2 h0.84 r90